# Altium PCB PCB_MR60FDA1 60GHz Radar to FTDI Adapter_2023-03-10.pcbdoc
Units mm, origin at the board's own origin, x right, y up, seen from the top; angles counter-clockwise.
Board outline 64.39 x 57.53 mm, 2 copper layers (Top Layer, Bottom Layer); 9 components, 8 nets, 32 pads, 0 vias.
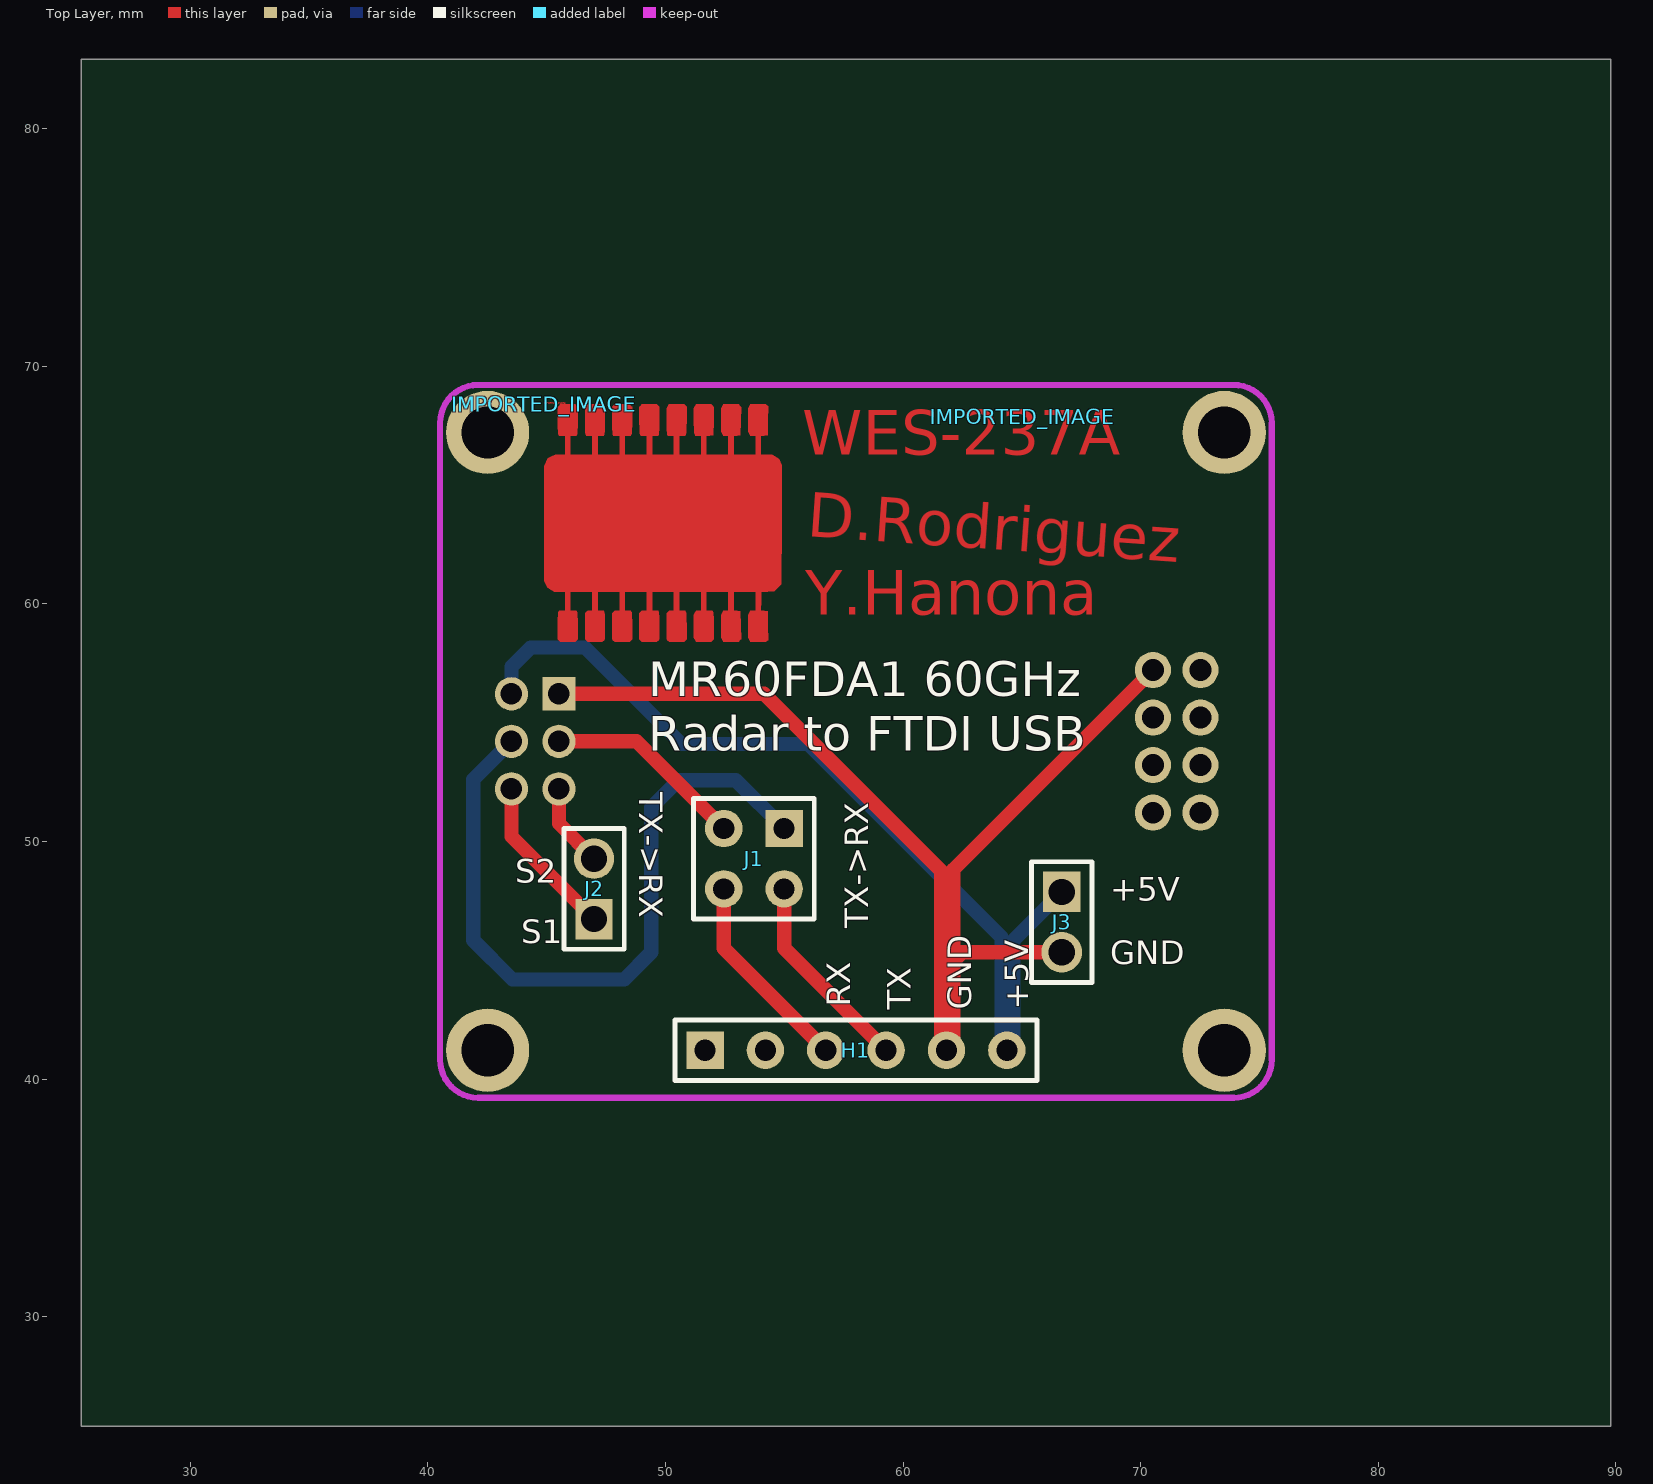
[diagram p0: Top Layer view]
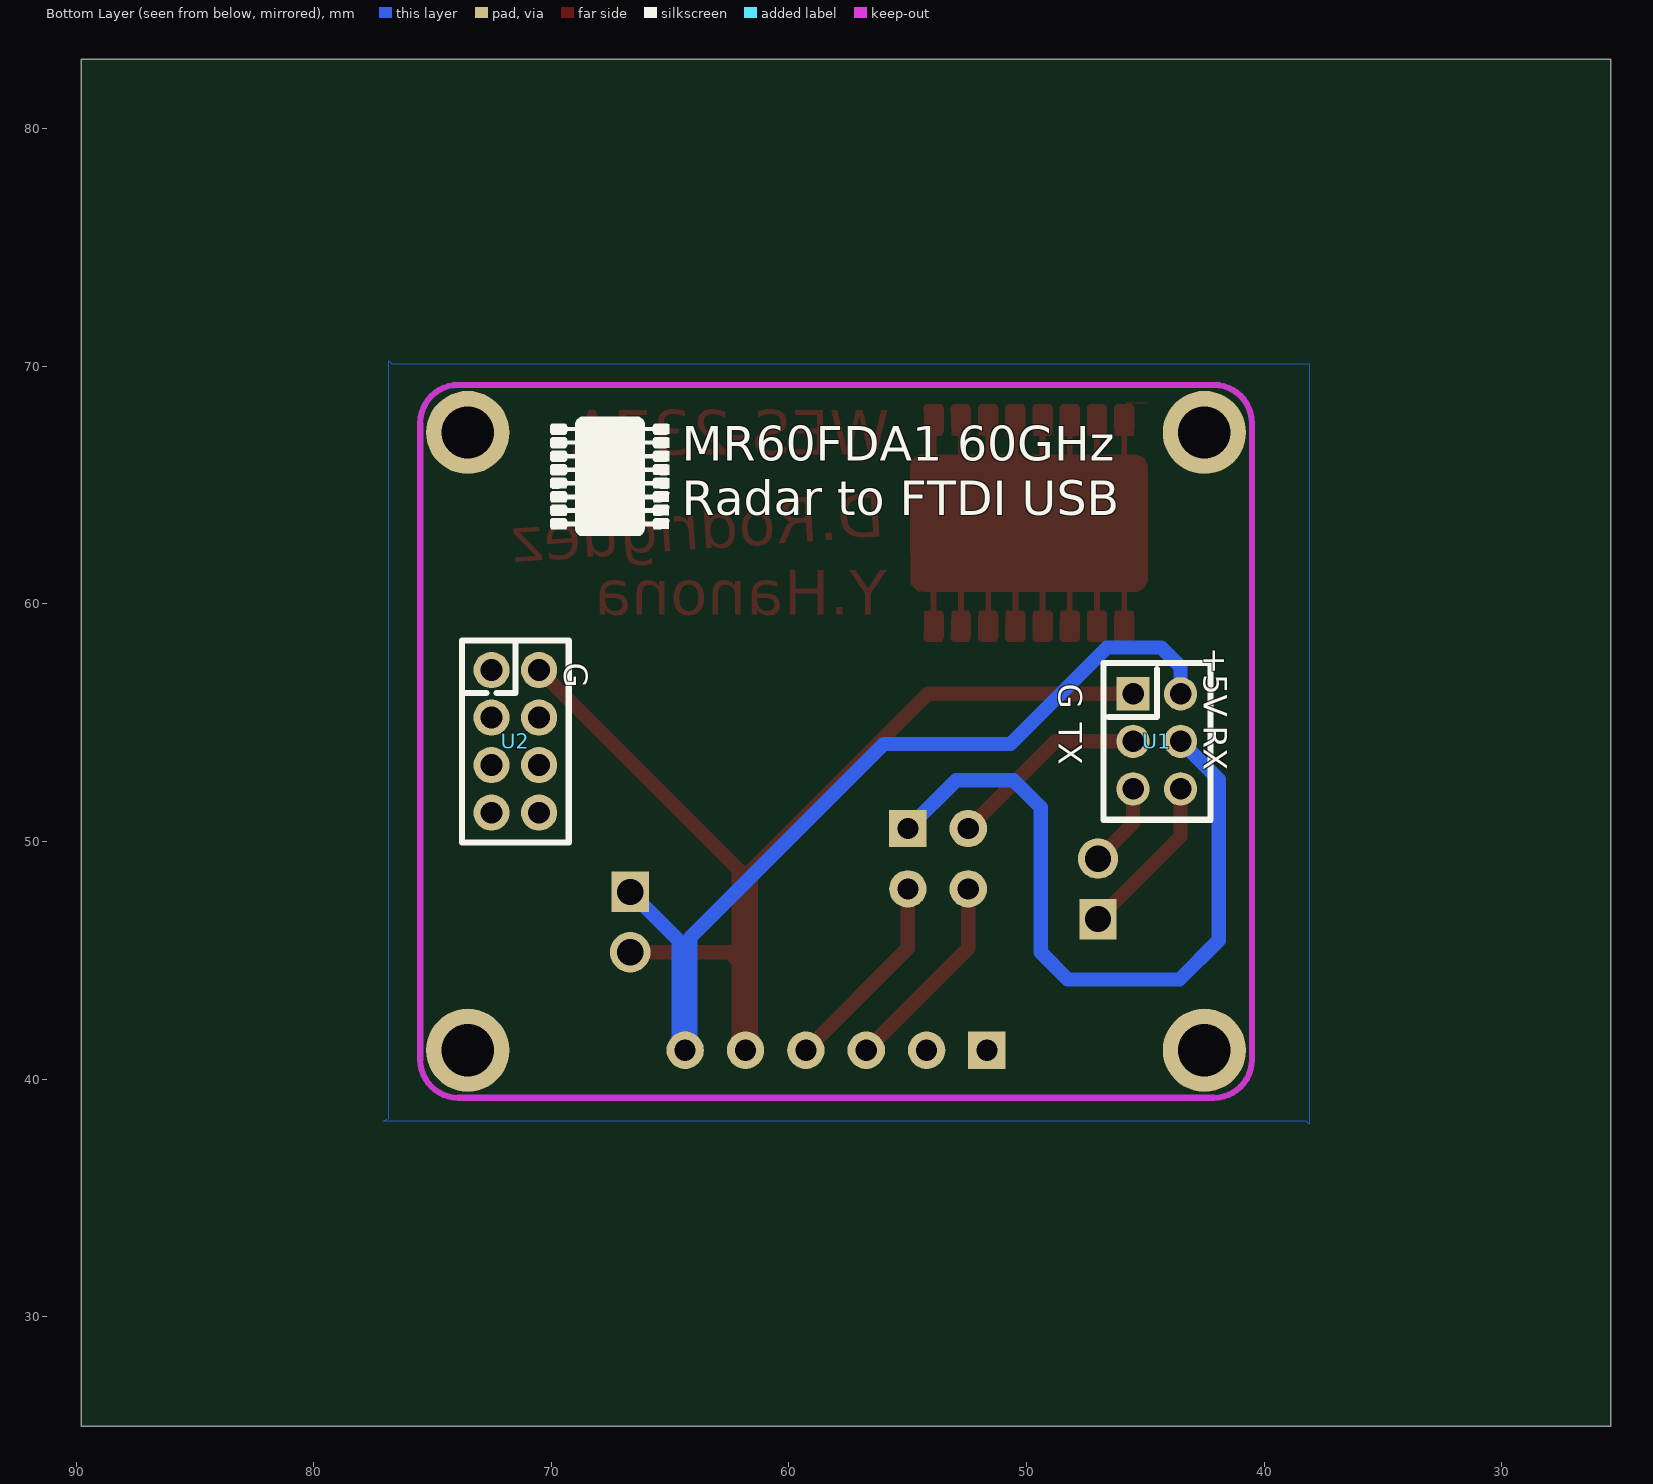
[diagram p1: Bottom Layer view, seen from below]

## Layer stack, top to bottom
Top Layer: signal copper (thickness not stored)
Dielectric: dielectric 0.32, FR-4, Dk 4.8
Bottom Layer: signal copper (thickness not stored)

## Board outline
89.789,25.4 25.4,25.4 25.4,82.931 89.789,82.931

## Components (designator, comment, footprint, x,y, rotation, side; value= is the part's Value field where it differs from the comment)
H1 "HDR-F-2.54_1x6" HDR-F-2.54_1X6 56.743,41.215 r0 top
IMPORTED_IMAGE "IMPORTED_IMAGE" IMPORTED_IMAGE#1 65.038,67.868 r0 top
IMPORTED_IMAGE "IMPORTED_IMAGE" IMPORTED_IMAGE#1 44.893,68.398 r0 top
IMPORTED_IMAGE "IMPORTED_IMAGE" IMPORTED_IMAGE#2 44.893,68.398 r0 top
J1 "HDR-M-2.54_2x2" HDR-M-2.54_2X2 53.721,49.276 r270 top
J2 "HDR-M-2.54_1x2" HDR-M-2.54_1X2 46.99,48.006 r90 top
J3 "HDR-M-2.54_1x2" HDR-M-2.54_1X2 66.675,46.609 r270 top
U1 "PM200-2-03-Z-4.3" HDR-TH_6P-P2.00-V-F-R2-C3-S2.00 44.513,54.215 r90 bottom
U2 "PM200V-12-08-H43" HDR-TH_8P-P2.00-V-F-R2-C4-S2.00-1 71.513,54.215 r90 bottom

## Footprints (in the part's own frame and the unit in brackets; to place one, negate y for a bottom-side part, rotate by r counter-clockwise, add the part's x,y. Pads: shape width x height; smd on the part's side, far side on the other; paste and mask are expansions set on the pad)
HDR-F-2.54_1X6 [mil]
  rect 62x62 hole 35: 1(-200,0)
  round 62 hole 35: 2(-100,0) 3(0,0) 4(100,0) 5(200,0) 6(300,0)
  silkscreen extent -250,-50 350,50
HDR-M-2.54_1X2 [mm]
  rect 1.7x1.575 hole 1.1: 1(-1.27,0)
  round 1.7 hole 1.1: 2(1.27,0)
  silkscreen extent -2.54,-1.27 2.54,1.27
HDR-M-2.54_2X2 [mil]
  rect 62x62 hole 35: 1(-50,50)
  round 62 hole 35: 2(50,50) 3(-50,-50) 4(50,-50)
  silkscreen extent -100,-100 100,100
HDR-TH_6P-P2.00-V-F-R2-C3-S2.00 [mm]
  rect 1.4x1.4 hole 0.9: 1(2,1)
  round 1.4 hole 0.9: 2(2,-1) 3(0,1) 4(0,-1) 5(-2,1) 6(-2,-1)
  silkscreen extent -3.3,-2.25 3.3,2.25
HDR-TH_8P-P2.00-V-F-R2-C4-S2.00-1 [mil]
  round 60 hole 36: 1(118.11,39.37) 2(118.11,-39.37) 3(39.37,39.37) 4(39.37,-39.37) 5(-39.37,39.37) 6(-39.37,-39.37) 7(-118.11,39.37) 8(-118.11,-39.37)
  silkscreen extent -167,-89 167,89
IMPORTED_IMAGE#1 [mm]
IMPORTED_IMAGE#2 [mm]
  Top Layer region: 573 vertices and 19 holes, not listed, extent 0,-10 10,0
  Top Layer region: 9.148,-6.468 9.024,-6.482 9.053,-6.278 9.273,-6.278 9.273,-6.454
  Top Layer region: 0.869,-6.476 0.826,-6.473 0.785,-6.467 0.753,-6.457 0.733,-6.445 0.727,-6.437 0.722,-6.427 0.718,-6.416 0.715,-6.403 0.713,-6.389 0.712,-6.375 0.713,-6.36 0.715,-6.346 0.728,-6.278 0.947,-6.278 0.975,-6.476
  Top Layer region: 13 vertices and 6 holes, not listed, extent 2.863,-5.595 7.136,-4.405
  Top Layer region: 77 vertices and 1 holes, not listed, extent 7.847,-5.593 8.943,-4.493
  Top Layer region: 1.408,-5.559 1.296,-5.487 1.285,-5.478 1.272,-5.469 1.259,-5.459 1.246,-5.447 1.233,-5.435 1.22,-5.422 1.206,-5.408 1.193,-5.394 1.179,-5.379 1.166,-5.364 1.154,-5.349 1.141,-5.333 1.13,-5.318 1.119,-5.303 1.109,-5.288 1.099,-5.273 1.013,-5.132 1.013,-5.031 1.014,-5.018 1.014,-5.004 1.016,-4.99 1.018,-4.976 1.021,-4.961 1.024,-4.947 1.028,-4.932 1.032,-4.917 1.037,-4.902 1.042,-4.887 1.048,-4.872 1.055,-4.857 1.062,-4.842 1.069,-4.827 1.077,-4.811 1.085,-4.796 1.093,-4.781 1.102,-4.767 1.111,-4.752 1.121,-4.737 1.131,-4.723 1.141,-4.709 1.152,-4.695 1.163,-4.681 1.174,-4.668 1.186,-4.655 1.198,-4.642 1.21,-4.63 1.222,-4.618 1.235,-4.607 1.247,-4.596 1.26,-4.585 1.377,-4.493 1.763,-4.493 2.073,-4.78 2.124,-5.099 2.052,-5.249 1.981,-5.4 1.846,-5.48 1.711,-5.559 hole: 462230.535,632371.79 462784.763,631270.7 462784.763,631270.7 466249.069,631270.7 466249.069,631270.7 467604.413,633693.352 467604.413,633693.352 466929.789,634904.932 466929.789,634904.932 466255.419,636116.258 466255.419,636116.258 463639.727,636375.338 463639.727,636375.338 462913.287,635805.362 462913.287,635805.362 462762.154,635672.897 462762.154,635672.897 462611.095,635514.548 462611.095,635514.548 462464.137,635336.267 462464.137,635336.267 462325.309,635144.009 462325.309,635144.009 462198.637,634943.726 462198.637,634943.726 462088.148,634741.372 462088.148,634741.372 461997.871,634542.898 461997.871,634542.898 461931.831,634354.26 461931.831,634354.26 461676.561,633473.134 461676.561,633473.134 462230.535,632371.79
  Top Layer region: 0.837,-3.754 0.768,-3.727 0.698,-3.701 0.713,-3.623 0.727,-3.546 0.848,-3.532 0.969,-3.518 0.969,-3.703
  Top Layer region: 9.163,-3.754 9.094,-3.727 9.024,-3.701 9.054,-3.546 9.272,-3.546 9.287,-3.623 9.302,-3.701 9.232,-3.727

## Free pads (board coordinates)
  round 3.5 hole 2.2: 1(42.513,41.215) 1(42.513,67.215) 1(73.513,41.215) 1(73.513,67.215)

## Nets (pads, with @x,y where several pads share a name; then routed paths per layer and width w, separated by ;. In a path a pad name is that pad's centre, name@x,y a point inside that pad or via, vN(x,y) a via of type N, cw(c..) or ccw(c..) an arc to the next point about the centre after c; other vN are vias at no path point)
+5V: H1.6 J3.1 U1.2 | length 39.6
  Bottom Layer w0.6: U1.2 43.513,57.356 44.323,58.166 46.609,58.166 50.673,54.102 56.007,54.102 64.135,45.974 64.135,41.443 H1.6 64.643,41.493 64.643,45.847 J3.1
GND: H1.5 J3.2 U1.1 U2.2 | length 55
  Top Layer w0.6: U1.1@45.514,56.215 54.148,56.215 61.595,48.768 61.595,41.443 H1.5 ; J3.2 62.484,45.339 61.824,44.679 H1.5 ; U2.2 62.103,48.806 62.103,41.493 H1.5
RXFTDI: H1.3 J1.4 | length 8.6
  Top Layer w0.6: J1.4 52.451,45.507 H1.3
RXMR: J1.1 U1.4 | length 30.7
  Bottom Layer w0.6: U1.4@43.513,54.216 41.91,52.611 41.91,45.847 43.561,44.196 48.26,44.196 49.403,45.339 49.403,51.435 50.546,52.578 52.959,52.578 J1.1
S1: J2.1 U1.6 | length 6.9
  Top Layer w0.6: U1.6 43.513,50.213 J2.1
S2: J2.2 U1.5 | length 3.6
  Top Layer w0.6: U1.5 45.513,50.753 J2.2
TXFTDI: H1.4 J1.2 | length 8.6
  Top Layer w0.6: J1.2 54.991,45.507 H1.4
TXMR: J1.3 U1.3 | length 8.5
  Top Layer w0.6: U1.3@45.514,54.216 48.781,54.216 J1.3
pads on no net: H1.1 H1.2 U2.1 U2.3 U2.4 U2.5 U2.6 U2.7 U2.8

## Polygon pours and split planes (outlines as drawn)
GND on Bottom Layer (solid): 38.1,70.104 38.1,38.1 38.227,38.227 77.089,38.227 76.835,38.354 76.835,70.231 76.708,70.104 38.1,70.104

## Keep-outs
Keep-Out Layer:
  lines w0.254: 40.513,40.815 ccw(c42.113,40.815) 42.113,39.215 ; 40.513,67.615 cw(c42.113,67.615) 42.113,69.215 ; 73.913,39.215 ccw(c73.913,40.815) 75.513,40.815 ; 73.913,69.215 cw(c73.913,67.615) 75.513,67.615

## Other copper
Top Layer:
  text "WES-237A" at 55.753,65.659 h3.2
  text "D.Rodriguez" at 55.88,62.23 h3.2 r356
  text "Y.Hanona" at 55.88,58.928 h3.2

## Silkscreen, mask and mechanical layers (free items; w line width, h text height)
Top Overlay:
  text "MR60FDA1 60GHz" at 49.276,55.626 h2.5
  text "Radar to FTDI USB" at 49.276,53.34 h2.5
  text "TX->RX" at 48.903,52.07 h1 r270
  text "S2" at 43.665,48.268 h1
  text "+5V" at 68.707,47.506 h1
  text "TX->RX" at 58.539,46.355 h1 r90
  text "S1" at 43.919,45.728 h1
  text "GND" at 68.707,44.839 h1
  text "RX" at 57.777,43.053 h1 r90
  text "TX" at 60.317,42.926 h1 r90
  text "GND" at 62.857,42.926 h1 r90
  text "+5V" at 65.27,42.926 h1 r90
Bottom Overlay:
  text "MR60FDA1 60GHz" at 64.516,65.532 h2.5
  text "Radar to FTDI USB" at 64.516,63.246 h2.5
  text "+5V" at 42.537,58.166 h1 r90
  text "G" at 69.461,57.531 h1 r90
  text "G" at 48.633,56.642 h1 r90
  text "TX" at 48.633,54.991 h1 r90
  text "RX" at 42.537,54.864 h1 r90
Top Solder:
  text "WES-237A" at 55.753,65.659 h3.2
  text "D.Rodriguez" at 55.88,62.23 h3.2 r356
  text "Y.Hanona" at 55.88,58.928 h3.2
Document:
  lines w0.003: 57.594,54.165 57.595,54.166